# EAGLE board GRUBswitch_CustomHW_RevB (EAGLE 9.6.2)
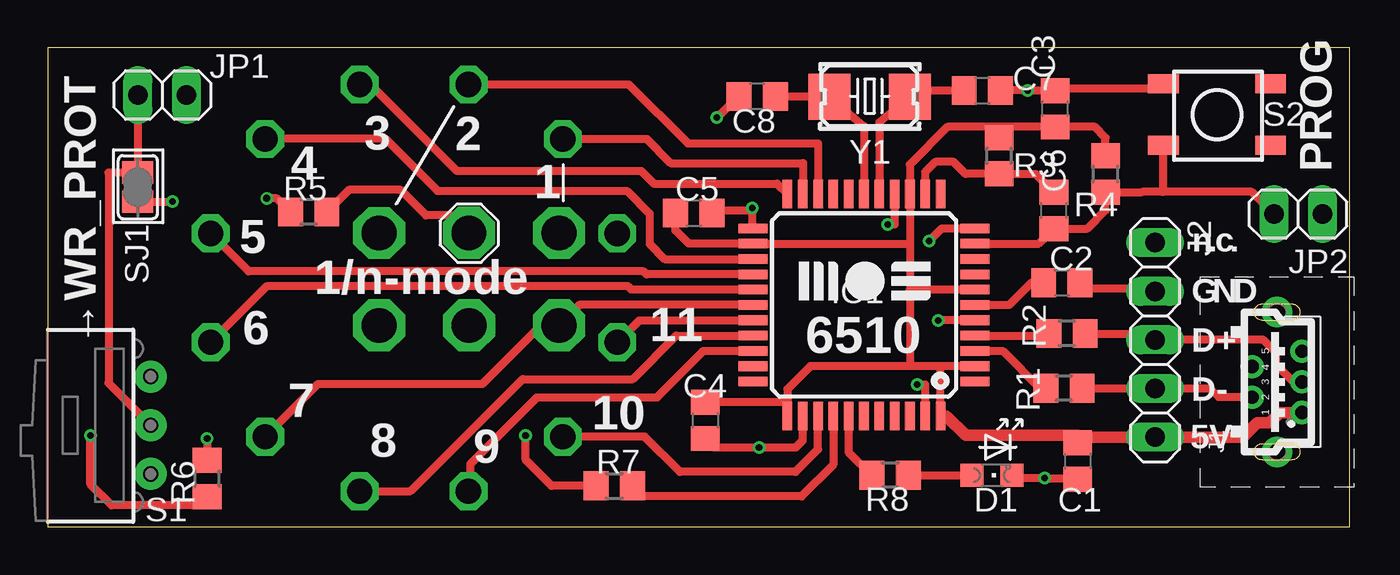
[diagram p0: board, top side]
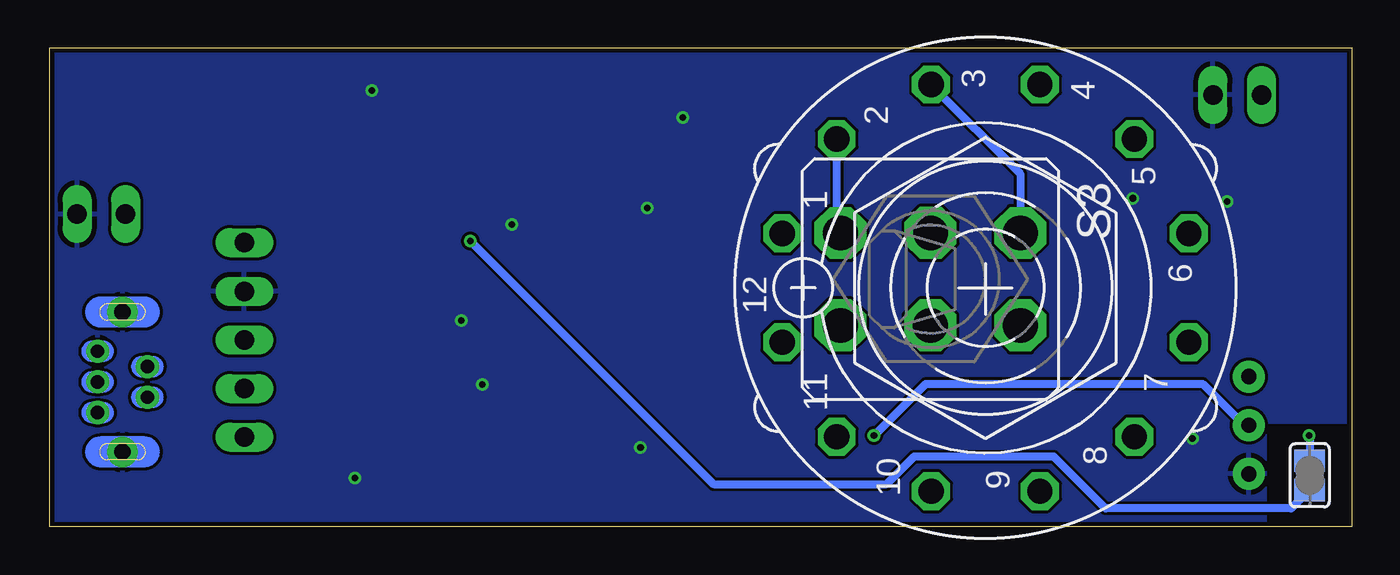
[diagram p1: board, bottom side, seen from below]

Size 68 x 25 mm. Coordinates in mm from the lower left corner, seen from the top.
Outline: 0,0 68,0 68,25 0,25 0,0
Copper layers (1*16): Top 0.035mm / dielectric 1.5mm / Bottom 0.035mm
Design rules "dirt_cheap_dirty_boards.v1.1": minimum track width 6mil, minimum drill 12mil, track to track 6mil, track to pad 6mil, pad to pad 6mil, via to via 6mil, smd to smd 0mil, copper to edge 10mil, drill to drill 10mil, minimum pad ring 10mil, minimum via ring 6mil, stop-mask expansion 2mil, vias tented up to drill 25mil, thermal gap 10mil

## Footprints (pad centres in the part's own frame; a part is rotated, then mirrored left to right if it is on the bottom)
C0805 = smd 1.3 x 1.5: 1 -0.95,0; 2 0.95,0
CHIPLED_0805 = smd 1.2 x 1.2: A 0,-1.05; C 0,1.05
TQFP44 = smd 1.5 x 0.5: 1 -5.8,4; 2 -5.8,3.2; 3 -5.8,2.4; 4 -5.8,1.6; 5 -5.8,0.8; 6 -5.8,0; 7 -5.8,-0.8; 8 -5.8,-1.6; 9 -5.8,-2.4; 10 -5.8,-3.2; 11 -5.8,-4; 23 5.8,-4; 24 5.8,-3.2; 25 5.8,-2.4; 26 5.8,-1.6; 27 5.8,-0.8; 28 5.8,0; 29 5.8,0.8; 30 5.8,1.6; 31 5.8,2.4; 32 5.8,3.2; 33 5.8,4 | smd 0.5 x 1.5: 12 -4,-5.8; 13 -3.2,-5.8; 14 -2.4,-5.8; 15 -1.6,-5.8; 16 -0.8,-5.8; 17 0,-5.8; 18 0.8,-5.8; 19 1.6,-5.8; 20 2.4,-5.8; 21 3.2,-5.8; 22 4,-5.8; 34 4,5.8; 35 3.2,5.8; 36 2.4,5.8; 37 1.6,5.8; 38 0.8,5.8; 39 0,5.8; 40 -0.8,5.8; 41 -1.6,5.8; 42 -2.4,5.8; 43 -3.2,5.8; 44 -4,5.8
MOLEX_502237-0517 = drill 0.7 pad 1.1: 1 -1.6,-1.3; 2 -0.8,1.3; 3 0,-1.3; 4 0.8,1.3; 5 1.6,-1.3 | drill 0.85 pad 1.6: SH1 -3.65,0; SH2 3.65,0
1X05 = drill 1.016 long: 1 -5.08,0; 2 -2.54,0; 3 0,0; 4 2.54,0; 5 5.08,0
1X02 = drill 1.016 long: 1 -1.27,0; 2 1.27,0
R0805 = smd 1.3 x 1.5: 1 -0.95,0; 2 0.95,0
WS_SLTU = drill 0.8 pad 1.676: 1 0,0; 2 -2.54,0; 3 2.54,0
TACTILE_SWITCH_SMD_4.5MM = smd 1.6 x 1: 1 -2.8,1.6; 2 2.8,1.6; 3 -2.8,-1.6; 4 2.8,-1.6
M9040P2 = drill 1.803 octagon: 1 -2.413,4.699; 3 -2.413,-4.699; 4 2.413,4.699; 5 2.413,0; 6 2.413,-4.699
SJ = smd 1.168 x 1.6: 1 -0.762,0; 2 0.762,0
CK101X12+ = drill 1.321 octagon: 1 -2.845,-10.617; 2 -7.772,-7.772; 3 -10.617,-2.845; 4 -10.617,2.845; 5 -7.772,7.772; 6 -2.845,10.617; 7 2.845,10.617; 8 7.772,7.772; 9 10.617,2.845; 10 10.617,-2.845; 11 7.772,-7.772; 12 2.845,-10.617 | drill 1.803 octagon: A -2.87,-2.87
CRYSTAL-SMD-5X3.2-2PAD = smd 2.2 x 2.4: P$1 2.1,0; P$2 -2.1,0

## Placement (x,y rotation side)
C1  1u  [C0805]  53.8,3.43 270 top
C2  1u  [C0805]  52.96,12.74 0 top
C3  100n  [C0805]  52.62,21.82 90 top
C4  100n  [C0805]  34.34,5.55 270 top
C5  100n  [C0805]  33.73,16.38 0 top
C6  100n  [C0805]  52.55,16.51 90 top
C7  30pF  [C0805]  48.81,22.78 0 top
C8  30pF  [C0805]  37.06,22.46 180 top
D1  [CHIPLED_0805]  49.31,2.68 270 top
IC1  ATMEGA32U4-NOPADAU  [TQFP44]  42.63,11.58 180 top
J1  MOLEX_USB_MINI_B  [MOLEX_502237-0517]  64.2,7.56 90 top
J2  USB_PINHEAD  [1X05]  57.84,9.75 90 top
JP1  [1X02]  5.97,22.54 0 top
JP2  [1X02]  65.31,16.32 180 top
R1  22R  [R0805]  53.07,7.23 180 top
R2  22R  [R0805]  53.23,10.09 180 top
R3  10k  [R0805]  49.69,19.37 90 top
R4  10k  [R0805]  55.24,18.41 90 top
R5  1k  [R0805]  13.62,16.43 180 top
R6  1k  [R0805]  8.32,2.51 90 top
R7  1k  [R0805]  29.59,2.13 0 top
R8  1k  [R0805]  44,2.68 180 top
S1  WS_SLTU  [WS_SLTU]  5.37,5.3 90 top
S2  [TACTILE_SWITCH_SMD_4.5MM]  61.07,21.52 0 top
S3  [M9040P2]  22,12.92 270 bottom
SJ1  [SJ]  4.7,17.73 270 top
SJ2  [SJ]  2.19,2.68 90 bottom
SR1  [CK101X12+]  19.12,12.47 270 bottom
Y1  16MHz  [CRYSTAL-SMD-5X3.2-2PAD]  42.93,22.46 0 top

## Library data of the parts
C1-C8 = rcl; SPICEPREFIX: C
D1 IC1 J1 S1-S3 SR1 Y1 = GRUB_Switch
J2 JP1 JP2 = pinhead
R1-R8 = rcl; SPICEPREFIX: R
SJ1 SJ2 = jumper

## Nets
+5V: C1.1 C3.1 C4.1 C5.1 IC1.2 IC1.7 IC1.14 IC1.24 IC1.34 IC1.44 J1.1 J2.1 R3.2 R4.2
/BINARY_MODE: IC1.11 SJ2.1
/BM: R6.1 SJ2.2
/HWB: C6.1 IC1.10 JP2.2 R4.1 S2.3
/RES: C6.2 IC1.13 R3.1
/WP: JP1.1 R7.1 S1.1 SJ1.1
/WR_PROT: IC1.37 R7.2
AREF: IC1.42
BOOT1: IC1.21 S3.3 SR1.2
BOOT2: IC1.20 S3.1 SR1.3
BOOT3: IC1.22 SR1.4
BOOT4: IC1.25 SR1.5
BOOT5: IC1.26 SR1.6
BOOT6: IC1.27 SR1.7
BOOT7: IC1.28 S3.6 SR1.8
BOOT8: IC1.30 SR1.9
BOOT9: IC1.31 SR1.10
BOOT10: IC1.36 SR1.11
BOOT11: IC1.29 SR1.12
D+: J1.3 J2.3 R2.1
D-: J1.2 J2.2 R1.1
GND: C1.2 C2.2 C3.2 C4.2 C5.2 C7.2 C8.2 D1.C IC1.5 IC1.15 IC1.23 IC1.35 IC1.43 J1.5 J1.SH1 J1.SH2 J2.4 JP1.2 JP2.1 R5.2 R6.2 S1.2 S2.1 SJ1.2
LED: IC1.38 R8.2
MENU: SR1.1
N$2: D1.A R8.1
R_D+: IC1.4 R2.2
R_D-: IC1.3 R1.2
SEL: R5.1 SR1.A
UCAP: C2.1 IC1.6
XTAL1: C8.1 IC1.17 Y1.P$2
XTAL2: C7.1 IC1.16 Y1.P$1

## Tracks (layer width: path | path; a pad name or v marks a point on that pad's centre or on a via)
+5V
  Top 0.305: R3.2 49.85,20.48 49.85,20.87
  Top 0.406: IC1.2 46.61,8.38 | 46.61,8.38 45.01,8.38 | 45.01,8.38 39.82,8.38 38.63,7.18 IC1.34 38.63,6.5 C4.1 | 45.03,14.78 IC1.14 45.03,18.9 47,20.87 49.85,20.87 C3.1 54.69,20.87 55.24,20.32 R4.2 | 45.03,14.78 45.03,12.37 | 45.03,12.37 45.03,8.39 45.01,8.38 | IC1.7 45.03,12.38 45.03,12.37 | 45.03,14.78 45.02,14.78 IC1.24 33.48,14.78 32.78,15.48 C5.1 | IC1.44 46.87,5.78 46.82,5.77 | IC1.44 46.63,8.36 46.61,8.38 | IC1.44 46.95,5.78
  Top 0.61: J1.1 64.35,5.96 63.82,5.43 63.18,5.43 62.43,4.67 J2.1 53.8,4.67 C1.1 53.78,4.39 53.78,4.76 47.96,4.76 46.95,5.78
/BINARY_MODE  (via drill 0.35)
  Top 0.406: IC1.11 46.69,15.58 v46.04,14.92
  Bottom 0.406: SJ2.1 3.16,0.95 12.86,0.95 15.56,3.65 22.86,3.65 24.29,2.22 33.34,2.22 v46.04,14.92
/BM  (via drill 0.35)
  Top 0.406: R6.1 7.87,1.11 3.33,1.11 2.22,2.22 v2.22,4.76
  Bottom 0.406: v2.22,4.76 2.19,4.73 SJ2.2
/HWB
  Top 0.406: IC1.10 51.76,14.78 C6.1 54.3,15.56 55.24,16.51 R4.1 57.15,17.46 57.17,17.48 58.22,17.48 | S2.3 58.27,17.53 58.22,17.48 | JP2.2 62.88,17.48 58.22,17.48
/RES
  Top 0.406: IC1.13 45.83,18.52 46.35,19.05 47.31,19.05 47.94,18.42 R3.1 51.59,18.42 C6.2
/WP  (via drill 0.35)
  Top 0.406: JP1.1 SJ1.1 3.17,18.49 3.17,7.49 S1.1 | R7.1 26.31,2.13 24.95,3.49 v24.95,4.76
  Bottom 0.406: v24.95,4.76 22.25,7.46 7.78,7.46 5.61,5.3 S1.1
/WR_PROT
  Top 0.406: IC1.37 41.03,3.25 39.37,1.59 31.08,1.59 R7.2
BOOT1
  Top 0.406: IC1.21 39.45,17.39 39.45,18.99 32.53,18.99 31.28,20.24 SR1.2
  Bottom 0.406: SR1.2 26.9,15.53 S3.3
BOOT2
  Top 0.406: SR1.3 30.36,23.09 33.43,20.01 40.23,20.01 IC1.20
  Bottom 0.406: SR1.3 17.3,18.42 S3.1
BOOT3
  Top 0.406: SR1.4 16.85,23.09 21.36,18.58 30.99,18.58 31.65,17.91 38.09,17.91 IC1.22
BOOT4
  Top 0.406: SR1.5 17.64,20.24 20.35,17.53 30.25,17.53 31.43,16.35 31.43,14.76 32.22,13.98 IC1.25
BOOT5
  Top 0.406: IC1.26 31.27,13.18 31.11,13.34 10.49,13.34 SR1.6
BOOT6
  Top 0.406: IC1.27 30.49,12.38 30.32,12.54 11.42,12.54 SR1.7
BOOT7
  Top 0.406: SR1.8 14.12,7.46 22.7,7.46 25.72,10.48 26.67,10.48 S3.6 27.77,11.58 IC1.28
BOOT8
  Top 0.406: SR1.9 18.94,1.85 24.8,7.71 30.55,7.71 32.82,9.98 IC1.30
BOOT9
  Top 0.406: SR1.10 22.07,1.95 22.07,3.27 25.55,6.75 31.82,6.75 34.25,9.18 IC1.31
BOOT10
  Top 0.406: SR1.11 31.17,4.7 33.01,2.86 39.05,2.86 40.23,4.04 IC1.36
BOOT11
  Top 0.406: IC1.29 30.89,10.78 SR1.12
D+
  Top 0.406: R2.1 57.5,10.09 J2.3 63.5,9.75 64.14,9.12 64.14,8.48 65.02,7.59 65.47,7.59 J1.3
D-
  Top 0.406: R1.1 57.82,7.23 J2.2 60.7,7.21 61.15,6.76 J1.2
GND  (via drill 0.35)
  Top 0.406: 36.8,16.51 v36.8,16.64 | J2.4 57.71,12.42 54.23,12.42 C2.2 | C5.2 34.61,16.51 36.8,16.51 | IC1.35 39.43,4.5 39.05,4.13 v37.15,4.13 34.82,4.13 C4.2 | IC1.5 v46.51,10.78 v46.51,10.77 | IC1.43 45.83,7.42 v45.41,7.42 | IC1.15 44.23,15.77 v43.87,15.77 | IC1.23 36.8,15.61 36.8,16.51 | C8.2 36.04,22.46 v34.95,21.36 | C7.2 v51.17,22.78 C3.2 52.7,22.86 58.32,22.86 58.32,23.07 S2.1 | C1.2 53.73,2.54 v52.07,2.54 50.5,2.54 D1.C | R5.2 11.96,17.14 v11.43,17.14 | v8.32,4.6 R6.2 | SJ1.2 6.49,16.97 v6.51,16.99
  pour Bottom: 0,0 68,0 68,25 0,25
  cutout Bottom: 4.4,5.32 4.4,0.03 -0.03,0.03 -0.03,5.32
LED
  Top 0.406: IC1.38 41.83,3.89 43.04,2.68 R8.2
N$2
  Top 0.406: R8.1 D1.A
R_D+
  Top 0.406: IC1.4 52.17,9.98 R2.2
R_D-
  Top 0.406: IC1.3 49.88,9.18 51.83,7.23 R1.2
SEL
  Top 0.406: R5.1 15.73,17.59 18.41,17.59 19.75,16.26 21.08,16.26 SR1.A
UCAP
  Top 0.406: IC1.6 50.21,11.58 51.38,12.74 C2.1
XTAL1
  Top 0.406: IC1.17 42.63,20.91 Y1.P$2 C8.1
XTAL2
  Top 0.406: IC1.16 43.43,21.1 Y1.P$1 45.1,22.78 C7.1

## Text on the board
top_silk: →WR_PROT | 3 | 2 | PROG | 4 | 1 | 5 | 1/n-mode | n | . | c | . | G | N | D | 6 | 11 | 6510 | D+ | D- | 7 | 10 | 8 | 5V | 9
bottom_silk: THE GRUB SWITCH | 4 | 2 | 8 | 1 | Custom Hardware Rev.B | n.c. | 2 | 1 | GND | D+ | Binary mode | D- | 5V